# EAGLE board bandmodule (EAGLE 8.1.0)
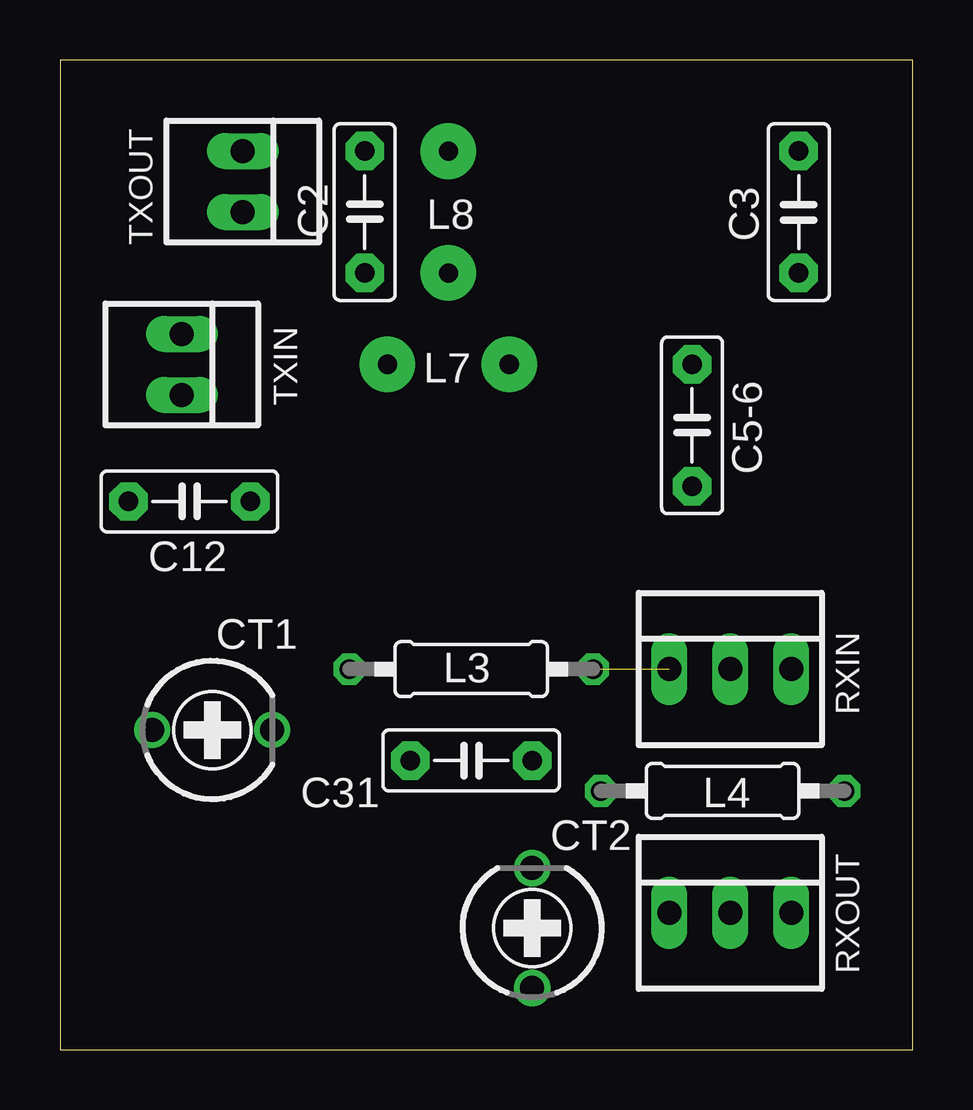
[diagram p0: board, top side]
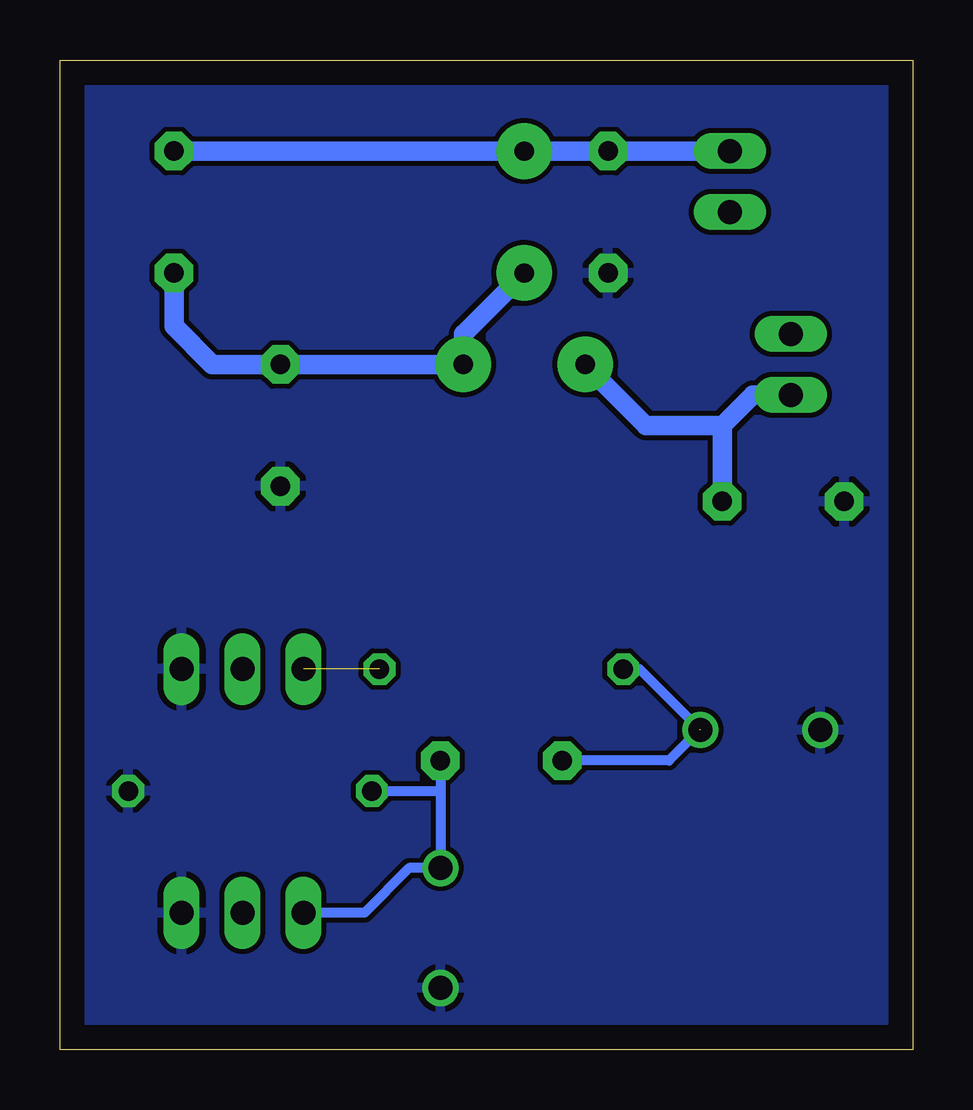
[diagram p1: board, bottom side, seen from below]

Size 35.55 x 41.27 mm. Coordinates in mm from the lower left corner, seen from the top.
Outline: 0,0 35.55,0 35.55,41.27 0,41.27 0,0
Copper layers (1*16): Top 0.035mm / dielectric 1.5mm / Bottom 0.035mm
Design rules "default": minimum track width 10mil, minimum drill 24mil, track to track 8mil, track to pad 8mil, pad to pad 8mil, via to via 8mil, smd to smd 8mil, copper to edge 40mil, drill to drill 8mil, minimum pad ring 10mil, minimum via ring 8mil, stop-mask expansion 4mil, vias tented up to drill 0mil, thermal gap 10mil

## Footprints (pad centres in the part's own frame; a part is rotated, then mirrored left to right if it is on the bottom)
C5B2.5 = drill 0.813 pad 1.6 octagon: 1 -2.54,0; 2 2.54,0
CTRIMTZ03 = drill 1: 1 0,2.5; 2 0,-2.5
0207/10 = drill 0.813 octagon: 1 -5.08,0; 2 5.08,0
T30-2-28AWG-15T = drill 0.8 pad 2.32: P$1 0,0; P$2 5.08,0
22-23-2031 = drill 1 long: 1 -2.54,0; 2 0,0; 3 2.54,0
22-23-2021 = drill 1 long: 1 -1.27,0; 2 1.27,0

## Placement (x,y rotation side)
C2  150p  [C5B2.5]  12.7,34.92 90 top
C3  33p  [C5B2.5]  30.8,34.92 270 top
C5-6  330p  [C5B2.5]  26.35,26.04 90 top
C12  150p  [C5B2.5]  5.4,22.86 0 top
C31  5p  [C5B2.5]  17.14,12.06 0 top
CT1  60p  [CTRIMTZ03]  6.35,13.34 90 top
CT2  60p  [CTRIMTZ03]  19.68,5.08 180 top
L3  5.6uH  [0207/10]  17.14,15.88 180 top
L4  5.6uH  [0207/10]  27.62,10.79 0 top
L7  T30-2 / 12T  [T30-2-28AWG-15T]  13.65,28.57 0 top
L8  T30-2 / 15T  [T30-2-28AWG-15T]  16.19,32.38 90 top
RXIN  22-23-2031  [22-23-2031]  27.94,15.88 0 top
RXOUT  22-23-2031  [22-23-2031]  27.94,5.71 0 top
TXIN  22-23-2021  [22-23-2021]  5.08,28.57 270 top
TXOUT  22-23-2021  [22-23-2021]  7.62,36.2 270 top

## Library data of the parts
C2 C3 C5-6 C12 C31 = capacitor-wima
CT1 CT2 = rcl
L3 L4 = eagle-ltspice; SPICEMODEL: NONE; SPICEPREFIX: L
L7 L8 = toroids
RXIN RXOUT = con-molex; MF: MOLEX; MPN: 22-23-2031; OC_FARNELL: 1462950; OC_NEWARK: 30C0862
TXIN TXOUT = con-molex; MF: MOLEX; MPN: 22-23-2021; OC_FARNELL: 1462926; OC_NEWARK: 25C3832

## Nets
GND: C2.1 C5-6.1 C12.1 CT1.1 CT2.1 L4.2 RXIN.3 RXOUT.3
N$1: L3.1 RXIN.1
N$2: C31.1 CT1.2 L3.2
N$4: C31.2 CT2.2 L4.1 RXOUT.1
N$5: C3.2 C5-6.2 L7.P$2 L8.P$1
N$6: C12.2 L7.P$1 TXIN.2
N$8: C2.2 C3.1 L8.P$2 TXOUT.1

## Tracks (layer width: path | path; a pad name or v marks a point on that pad's centre or on a via)
GND
  pour Bottom: 0,41.27 35.56,41.27 35.56,0 0,0
N$1  (1 unrouted)
N$2  (1 unrouted)
  Bottom 0.406: 8.89,13.34 10.16,12.06 C31.1 | CT1.2 11.39,15.88 L3.2
N$4
  Bottom 0.406: RXOUT.1 22.86,5.71 21,7.58 CT2.2 19.68,10.79 | C31.2 19.68,10.79 | L4.1 19.68,10.79
N$5
  Bottom 0.813: L8.P$1 18.73,29.84 L7.P$2 C5-6.2 29.21,28.57 30.8,30.16 C3.2
N$6
  Bottom 0.813: TXIN.2 6.67,27.3 7.94,26.04 | 7.94,26.04 C12.2 | L7.P$1 11.11,26.04 7.94,26.04
N$8
  Bottom 0.813: TXOUT.1 C2.2 L8.P$2 C3.1